# Altium PCB Ver2.PcbDoc
Units mm, origin at the board's own origin, x right, y up, seen from the top; angles counter-clockwise.
Board outline 108.84 x 44.45 mm, 2 copper layers (Top Layer, Bottom Layer); 32 components, 20 nets, 88 pads, 6 vias.
Unrouted connection lines stored in the file: 4.
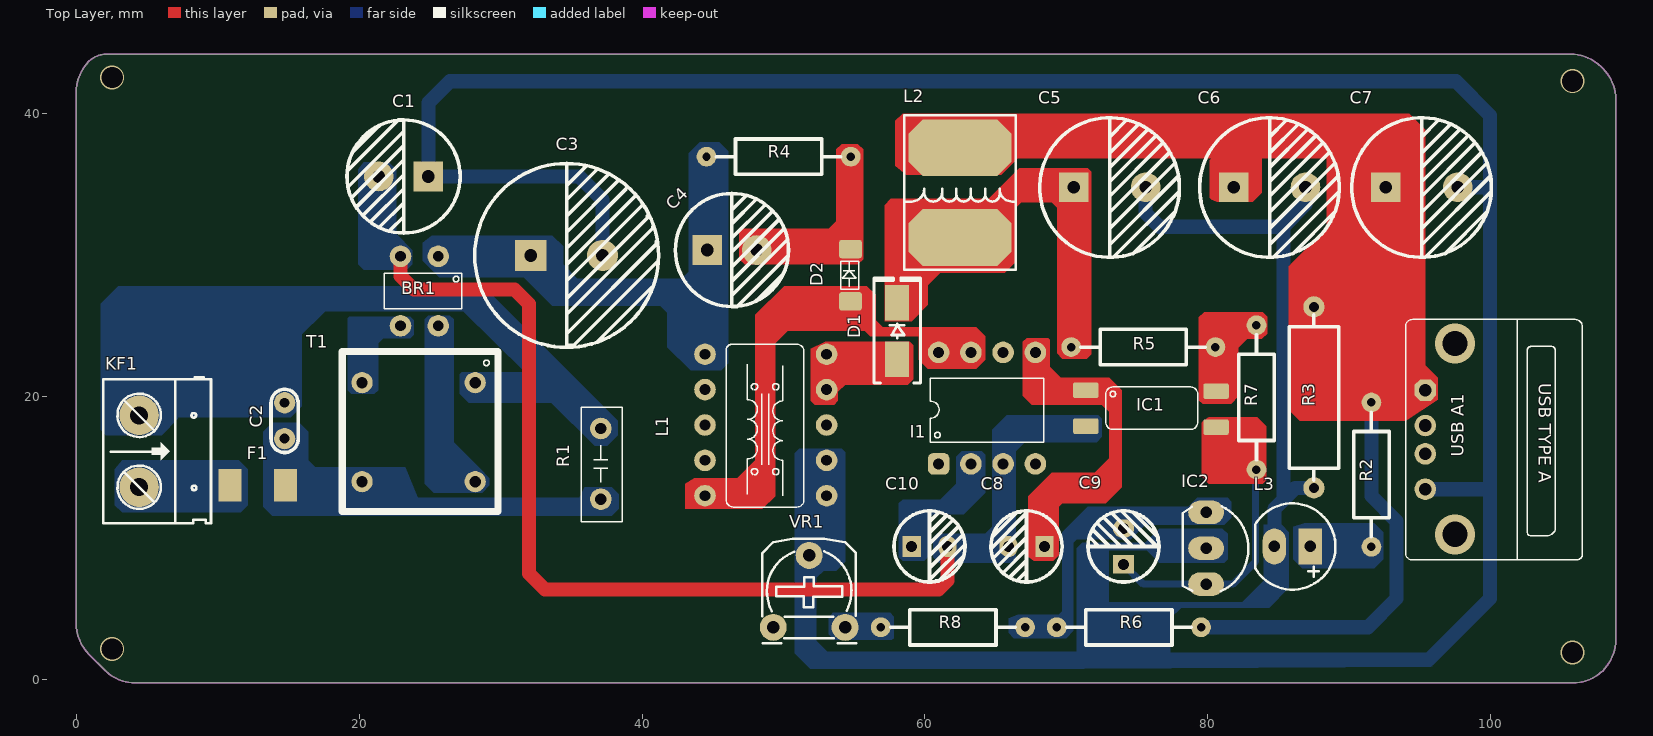
[diagram p0: Top Layer view]
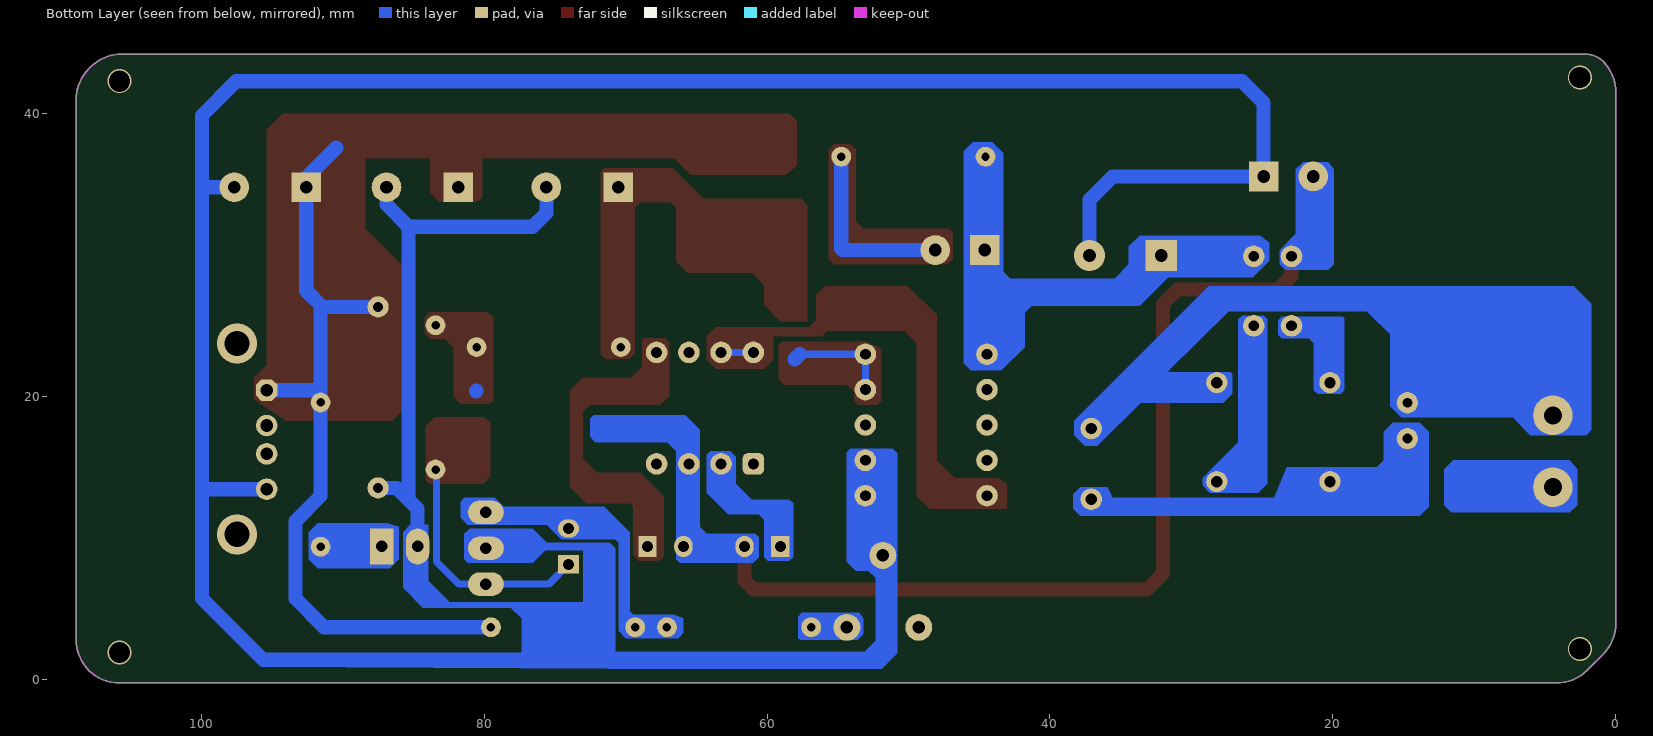
[diagram p1: Bottom Layer view, seen from below]
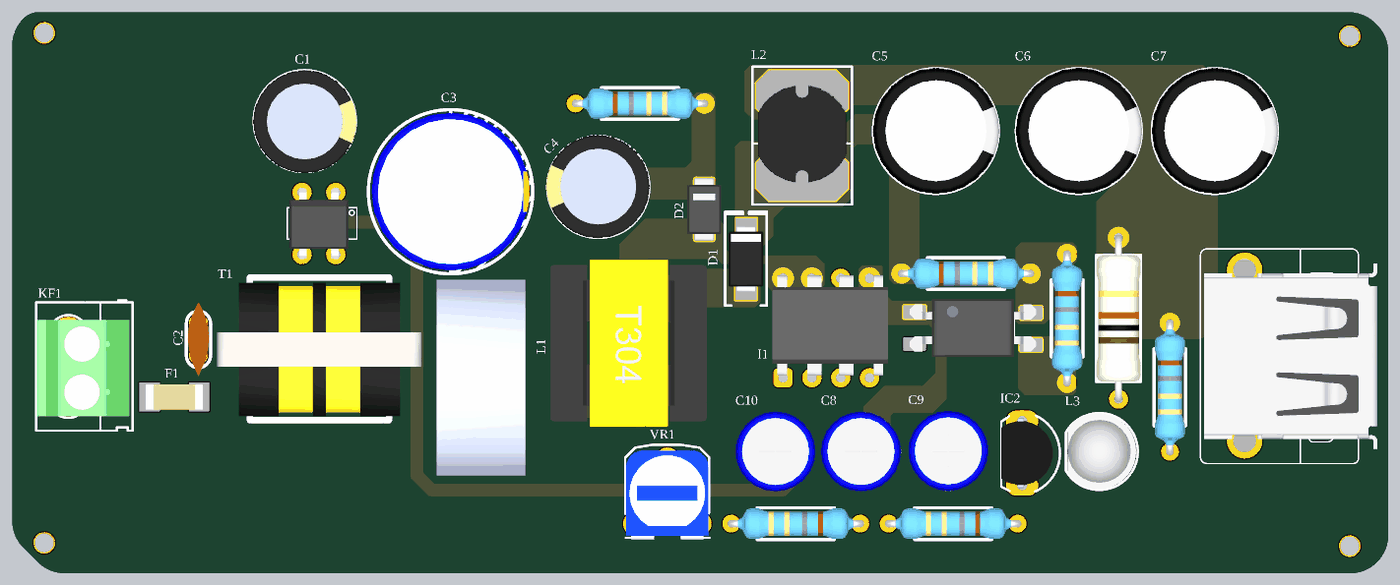
[diagram p2: 3D render of the assembled board from above, using the file's embedded part models]

## Layer stack, top to bottom
Top Solder: solder mask 0.0102, Solder Resist, Dk 3.5
Top Layer: signal copper 0.0356
Dielectric 1: dielectric 0.32, FR-4, Dk 4.8
Bottom Layer: signal copper 0.0356
Bottom Solder: solder mask 0.0102, Solder Resist, Dk 3.5

## Board outline
0.898,1.769 cw(c3.066,3.937) 0,3.937 0,41.529 cw(c3.066,41.529) 0.898,43.697 cw(c2.103,42.492) 2.103,44.196 105.664,44.196 cw(c105.664,41.13) 107.832,43.298 107.941,43.189 cw(c105.773,41.021) 108.839,41.021 108.839,2.794 cw(c105.773,2.794) 107.941,0.626 cw(c105.817,2.75) 105.817,-0.254 4.191,-0.254 cw(c4.191,2.812) 2.023,0.644

## Design rules (kind name [scope] priority, off if disabled: settings)
Clearance [All] p1: gap=0.254 ignorepadtopadclearanceinfootprint=FALSE except(0: Arc-Hole Track-Hole SMDPad-Hole THPad-Hole Via-Hole Fill-Hole Poly-Hole Region-Hole Text-Hole)
PolygonConnect [All] p1: connectstyle=Relief reliefconductorwidth=0.254 reliefentries=4 polygonreliefangle="90 Angle" airgapwidth=0.254
RoutingVias [All] p1: holewidth=0.711 width=1.27 viastyle="Through Hole" minholewidth=0.711 minwidth=1.27 maxholewidth=0.711 maxwidth=1.27
SolderMaskExpansion [All] p1: expansion=0.102
Width [All] p1: maxlimit=1 minlimit=0.5 preferedwidth=0.5
30 further rules are at their usual default settings.

## Components (designator, comment, footprint, x,y, rotation, side; value= is the part's Value field where it differs from the comment)
BR1 "MB6M" MB6M 24.257,27.305 r180 top
C1 "2.2nF" "tu hoa 8mm" 23.142,35.56 r180 top
C2 "104" "tu gom" 14.732,18.288 r90 top
C3 "22uF" "tu hoa 13mm" 34.671,29.972 r0 top
C4 "2.2nF" "tu hoa 8mm" 46.355,30.353 r0 top
C5 "1000uF" "tu hoa 10mm" 73.063,34.798 r0 top
C6 "1000uF" "tu hoa 10mm" 84.366,34.798 r0 top
C7 "1000uF" "tu hoa 10mm" 95.123,34.798 r0 top
C8 "0.1uF" "tu hoa 5mm" 67.183,9.398 r180 top
C9 "0.1uF" "tu hoa 5mm" 74.041,9.398 r90 top
C10 "100uF" "tu hoa 5mm" 60.325,9.398 r0 top
D1 "SS54 - SMC" "DIODE SMA" 58.039,24.638 r90 top
D2 "RS1M SMA" "RS1M SMA" 54.737,28.575 r270 top
F1 "0.5A 125V" "Cau Chi SMD1808" 12.827,13.716 r0 top
I1 "DK1203" DK1203 64.389,19.177 r0 top
IC1 "PC817" PC817 75.184,19.177 r0 top
IC2 "TL431" qto-92 79.883,9.271 r270 top
KF1 "CON 2 KF301" "Con 2 KF301 5.08" 4.445,18.669 r270 top
L1 "EE 13" "Trans EE13" 48.75,17.987 r270 top
L2 "10uH - 4A SMD" "Cuon Cam 7x7x5" 62.484,30.607 r0 top
L3 "LED 5mm" LED-5MM-RED 87.249,9.398 r180 top
R1 "7D471" "Inrush current limiter" 37.084,15.24 r270 top
R2 "1k" "tro vach 1/4w" 91.567,14.478 r90 top
R3 "470R" "tro vach 1/2w" 87.503,19.939 r90 top
R4 "68k" "tro vach 1/4w" 49.657,36.957 r180 top
R5 "1k" "tro vach 1/4w" 75.438,23.495 r180 top
R6 "4.7k" "tro vach 1/4w" 74.422,3.683 r0 top
R7 "4.7k" "tro vach 1/4w" 83.439,19.939 r90 top
R8 "4.7k" "tro vach 1/4w" 61.976,3.683 r0 top
T1 "UU9.8 103" "UU8.9 103" 24.003,17.78 r180 top
"USB A1" "USB" "USB A" 95.377,16.947 r270 top
VR1 "500R" "Bien Tro Tam Giac Dung" 49.276,3.683 r0 top

## Footprints (in the part's own frame and the unit in brackets; to place one, negate y for a bottom-side part, rotate by r counter-clockwise, add the part's x,y. Pads: shape width x height; smd on the part's side, far side on the other; paste and mask are expansions set on the pad)
"Bien Tro Tam Giac Dung" [mil] "RM065"
  round 75 hole 35: 1(0,0) 2(100,200) 3(200,0)
  silkscreen extent -31,-44 231,246, body extent -28,-50 228,228, height 279
"Cau Chi SMD1808" [mil]
  rect 64x90 smd: 1(-77,0) 2(77,0)
  body extent -91,-39 91,39, height 39
"Con 2 KF301 5.08" [mil]
  round 110 hole 50: 1(0,0) 2(200,0)
  silkscreen extent -106,-100 300,200, body extent -45,-97 255,190, height 335
"Cuon Cam 7x7x5" [mm] "Cuon Cam 7x7x5"
  oct 7.3x4 smd: 1(0,0.635) 2(0,6.985)
  silkscreen extent -3.94,-1.65 3.94,9.27, body extent -3.5,0.07 3.5,7.8, height 5.02
"DIODE SMA" [mm] "SMA"
  rect 2.5x1.7 smd: 1(-2,0) 2(2,0)
  silkscreen extent -3.68,-1.65 3.75,1.65, body extent -2.6,-1.37 2.6,1.37, height 2.4
DK1203 [mil]
  rrect50% 60x60 hole 30: 1(-134.65,-155.12)
  round 60 hole 30: 2(-44.88,-155.12) 3(44.88,-155.12) 4(134.65,-155.12) 5(134.65,155.12) 6(44.88,155.12) 7(-44.88,155.12) 8(-134.65,155.12)
  silkscreen extent -157,-94 157,83, body extent -167,-148 193,164, height 180
"Inrush current limiter" [mm]
  round 1.524 hole 0.8: 1(-2.5,0) 2(2.5,0)
  silkscreen extent -4,-1.4 4.1,1.5, body extent -7.75,-3.5 7.75,3.5, height 19
LED-5MM-RED [mil] "LED 2 PIN, 5 ly , Only colour,pin to pin 100mil"
  rect 65x100 hole 32: 1(0,0)
  oval 65x100 hole 32: 2(100,0)
  silkscreen extent -70,-120 154,120, body extent -65,-119 149,118, height 339
MB6M [mil]
  round 60 hole 30: 1(-52.56,-102.56) 2(52.56,-102.56) 3(52.56,90.75) 4(-52.56,90.75)
  silkscreen extent -118,-55 98,43, body extent -92,-133 92,125, height 83
PC817 [mm]
  rrect25% 1.8x1.1 smd: 1(-3.81,1.27) 2(-3.81,-1.27) 3(5.4,-1.34) 4(5.4,1.2)
  silkscreen extent -2.4,-1.5 4.1,1.5, body extent -4.2,-2.29 5.8,2.29, height 3.75
qto-92 [mil] "TO-92"
  oval 66x100 hole 32: 1(-100,0) 2(0,0) 3(100,0)
  silkscreen extent -117,-65 120,118, body extent -109,-66 109,95, height 245
"RS1M SMA" [mm]
  rrect25% 1.3x1.6 smd: 1(-1.85,0) 2(1.85,0)
  silkscreen extent -1,-0.7 1,0.6, body extent -2.5,-1.35 2.5,1.35, height 2.38
"Trans EE13" [mil]
  round 60 hole 30: 1(-196.85,-169.29) 2(-98.43,-169.29) 3(0,-169.29) 4(98.43,-169.29) 5(196.85,-169.29) 6(196.85,169.29) 7(98.43,169.29) 8(0,169.29) 9(-98.43,169.29) 10(-196.85,169.29)
  silkscreen extent -224,-110 228,106, body extent -260,-244 260,244, height 468
"tro vach 1/2w" [mm]
  round 1.5 hole 0.7: 1(-6.4,0) 2(6.4,0)
  silkscreen extent -5.84,-1.75 5.84,1.75, body extent -6.62,-1.75 6.62,1.75, height 3.5
"tro vach 1/4w" [mm]
  round 1.4 hole 0.6: 1(-5.1,0) 2(5.1,0)
  silkscreen extent -4.39,-1.25 4.42,1.25, body extent -5.38,-1.2 5.38,1.2, height 2.41
"tu gom" [mm] "Tu gom mini"
  round 1.5 hole 0.7: 1(-1.27,0) 2(1.27,0)
  silkscreen extent -2.25,-0.97 2.22,0.97, body extent -2.92,-0.85 2.92,0.85, height 6.12
"tu hoa 5mm" [mm]
  rect 1.3x1.5 hole 0.8: 1(-1.27,0)
  oval 1.3x1.5 hole 0.8: 2(1.27,0)
  silkscreen extent -2.51,-2.51 2.51,2.51, body extent -3.12,-3.18 3.23,3.18, height 14.55
"tu hoa 8mm" [mm]
  rect 2.1x2.1 hole 0.9: 1(-1.75,0)
  round 2.1 hole 0.9: 2(1.75,0)
  silkscreen extent -4,-4 4,4, body extent -4.1,-4.07 4.1,4.13, height 13.81
"tu hoa 10mm" [mm]
  rect 2.1x2.1 hole 0.9: 1(-2.54,0)
  round 2.1 hole 0.9: 2(2.54,0)
  silkscreen extent -4.95,-4.96 4.93,4.92, body extent -5,-5 4.97,5, height 20.01
"tu hoa 13mm" [mm]
  rect 2.2x2.2 hole 0.9: 1(-2.54,0)
  round 2.2 hole 0.9: 2(2.54,0)
  silkscreen extent -6.5,-6.5 6.5,6.5, body extent -6.25,-6.25 6.26,6.25, height 23.02
"USB A" [mm]
  oct 1.524x1.524 hole 0.9: 1(-3.5,0)
  round 1.524 hole 0.9: 2(-1,0) 3(1,0) 4(3.5,0)
  silkscreen extent -8.5,-1.4 8.5,11.1, body extent -7.9,-1.1 7.9,12.6, height 6.95
"UU8.9 103" [mm]
  round 1.5 hole 0.8: 1(-4.2,-3.2) 2(3.8,-3.2) 3(3.8,3.8) 4(-4.2,3.8)
  silkscreen extent -5.8,-5.4 5.2,5.9, body extent -8.38,-5 7.78,5.6, height 15.3

## Part data
C1 C4: library part "Tu Hoa 2.2uF 400V 8x12", "C?m", Chung_Loai=C?m, Don_Vi=Con, Ma_Hang=MH003743, So_Chan=2, Ten_Linh_Kien="T? Hóa 2.2uF 400V 8x12MM"
C2: library part "Tu gom 104 50V", "C?m", Chung_Loai=C?m, Don_Vi=Con, Ma_Hang=MH004761, So_Chan=2, Ten_Linh_Kien="T? g?m 104 100nF 50V"
C3: library part "Tu Hoa 22uF 400V 13x20", "C?m", Chung_Loai=C?m, Don_Vi=Con, Ma_Hang=MH004801, So_Chan=2, Ten_Linh_Kien="T? Hóa 22uF 400V 13x20MM"
C5 C6 C7: library part "Tu Hoa 1000uF 10V 10x12", "C?m", Chung_Loai=C?m, Don_Vi=Con, Ma_Hang=MH006614, So_Chan=2, Ten_Linh_Kien="T? Hóa 1000uF 10V 10x12MM"
C8 C9: library part "Tu Hoa 0.1uF 50V 5x11", "C?m", Chung_Loai=C?m, Don_Vi=Con, Ma_Hang=MH006853, So_Chan=2, Ten_Linh_Kien="T? Hóa 0.1uF 50V"
C10: library part "Tu Hoa 100uF 16V 5x7", "C?m", Chung_Loai=C?m, Don_Vi=Con, Ma_Hang=MH001347, So_Chan=2, Ten_Linh_Kien="T? Hóa 100uF 16V 5x7MM"
D1: library part "Diode SS34 ( 1N5822 )", "Dán", Chung_Loai=Dán, Don_Vi=Con, Ma_Hang=MH002104, Ten_Linh_Kien="Diode SS34 3A 40V SMA ( 1N5822 SS34A)"
F1: library part "Cau chi 0.5A 125V SMD1808", "Cau chi 0.5A 125V SMD1808", Ma_Hang=MH009241, Ten="C?u Chì 0.5A 125V SMD1808 0451.500MRL"
I1: library part Dk1203
IC1: library part PC871
IC2: "Programmable Shunt Regulator"
KF1: "C?m", Chung_Loai=C?m, Don_Vi=Con, Ma_Hang=MH000987, Ten_Linh_Kien="CON 2 KF301-2P 5.08MM Xanh Duong"
L1: library part "EE 20-10-6"
L2: library part "CUON CAM 47uH SMD", "Dán", Chung_Loai=Dán, Don_Vi=Con, Ma_Hang=MH004211, Ten_Linh_Kien="Cu?n C?m 47uH 7x7x4MM CD74R"
L3: library part "LED 5mm Do", "C?m", Chung_Loai=C?m, Don_Vi=Con, Ma_Hang=MH008967, Ten_Linh_Kien="Led 5MM Ph? Ð? (1000c)"
R1: library part "Tu chong set"
R2 R5: library part "Tro Vach 1/4W 5% 1k", "C?m", Chung_Loai=C?m, Don_Vi=Con, Ma_Hang=MH007390, So_Chan=2, Ten_Linh_Kien="Tr? V?ch 1/4w 5% 1k"
R3: library part "Tro Vach 1/2W 5% 470R", "C?m", Chung_Loai=C?m, Don_Vi=Con, Ma_Hang=MH006200, So_Chan=2, Ten_Linh_Kien="Tr? 5% 1/2w 470R"
R4: library part "Tro Vach 1/4W 5% 68k", "C?m", Chung_Loai=C?m, Don_Vi=Con, Ma_Hang=MH007332, So_Chan=2, Ten_Linh_Kien="Tr? V?ch 1/4w 5% 68k"
R6 R7 R8: library part "Tro Vach 1/4W 5% 4.7k", "C?m", Chung_Loai=C?m, Don_Vi=Con, Ma_Hang=MH007317, So_Chan=2, Ten_Linh_Kien="Tr? V?ch 1/4w 5% 4.7k"
"USB A1": library part "USB TYPE A FEMALE"
VR1: library part "Bien tro tam giac 1K Dung", "C?m", Chung_Loai=C?m, Don_Vi=Con, Ma_Hang=MH003709, Ten_Linh_Kien="Bi?n Tr? Tam Giác 102-1K RM065"

## Via types
v1: diameter 1.7, hole 1.5, Top Layer to Bottom Layer, 4 vias
v2: diameter 2.8, hole 1.8, Top Layer to Bottom Layer, 2 vias

## Nets (pads, with @x,y where several pads share a name; then routed paths per layer and width w, separated by ;. In a path a pad name is that pad's centre, name@x,y a point inside that pad or via, vN(x,y) a via of type N, cw(c..) or ccw(c..) an arc to the next point about the centre after c; other vN are vias at no path point)
5V-1: C5.1 D1.2 L2.1 R5.2 | length 6.3
  Top Layer w1: D1.2@58.039,26.797 L2.1
5V-2: "USB A1.1" C6.1 C7.1 L2.2 R2.2 R3.2 R6.2 | length 77.9
  Top Layer w1: L2.2 80.518,37.592 81.826,36.284 C6.1
  Bottom Layer w1: R6.2 91.313,3.683 93.345,5.715 93.345,11.176 91.567,12.954 R2.2 91.567,20.32 ; R3.2 91.44,26.339 ; 90.462,37.592 92.583,35.471 C7.1 92.583,27.482 91.44,26.339 ; 95.377,20.447 91.694,20.447 91.567,20.32 ; 91.44,26.339 91.567,26.212 91.567,20.32
DCLine: BR1.1 C3.1 C4.1 L1.1 R4.2 | length 34.1
  Bottom Layer w1: BR1.1 32.069,29.91 C3.1 34.925,27.178 44.45,27.178 ; L1.1 44.45,27.178 ; R4.2 44.557,30.401 C4.1 44.45,30.198 44.45,27.178
GND-1: BR1.2 C1.2 C8.2 C10.2 I1.3 IC1.2 | length 87.7
  Top Layer w1: BR1.2 22.922,28.513 23.876,27.559 30.988,27.559 32.004,26.543 32.004,7.493 33.147,6.35 60.96,6.35 61.595,6.985 C10.2
  Bottom Layer w0.5: C10.2 C8.2 65.529,9.782 I1.3 65.529,17.015 66.421,17.907 71.374,17.907
  Bottom Layer w1: C1.2 21.392,31.44 BR1.2
GND-2: "USB A1.4" C1.1 C3.2 C5.2 C6.2 C7.2 IC2.2 L1.6 L1.7 L3.2 R3.1 VR1.2 | length 244.6
  Bottom Layer w0.5: VR1.2 51.816,2.286 52.832,1.27 72.009,1.27 ; IC2.2 IC2.2@79.883,9.282
  Bottom Layer w1: C3.2 37.211,33.909 35.56,35.56 C1.1 24.892,40.767 26.416,42.291 97.536,42.291 99.949,39.878 99.949,34.798 ; VR1.2 53.05,9.997 L1.6 L1.7 ; 72.009,2.794 73.406,1.397 95.631,1.397 99.949,5.715 99.949,13.447 ; C5.2 75.603,32.982 76.581,32.004 85.344,32.004 ; L3.2 84.709,12.065 85.471,12.827 ; C6.2 86.906,33.566 85.344,32.004 ; R3.1 86.183,13.539 85.471,12.827 ; 95.377,13.385 95.377,13.447 99.949,13.447 ; C7.2@98.336,34.798 99.949,34.798 ; 85.344,32.004 85.344,12.954 85.471,12.827 ; 99.949,13.447 99.949,34.798
NetBR1_3: BR1.3 T1.2 | length 6.2
  Bottom Layer w0.5: T1.2 20.203,24.14 21.063,25 BR1.3
NetBR1_4: BR1.4 T1.4 | length 12.1
  Bottom Layer w0.5: BR1.4 25.592,16.591 T1.4
NetC2_1: C2.1 F1.2 R1.2 T1.3 | length 8.9
  Bottom Layer w0.5: C2.1 14.783,16.967 14.783,13.716 15.047,13.98 T1.3 ; R1.2@37.084,12.726 R1.2
NetC2_2: C2.2 KF1.1 R1.1 T1.1 | length 47.9
  Bottom Layer w0.5: KF1.1 5.334,19.558 C2.2 14.732,23.495 18.288,27.051 27.773,27.051 33.844,20.98 ; T1.1 33.844,20.98 ; R1.1 33.844,20.98
NetC4_2: C4.2 D2.1 R4.1 | length 13.2
  Bottom Layer w1: C4.2 54.665,30.353 54.737,30.425 54.757,30.445 R4.1
NetC8_1: C8.1 I1.5 IC1.1 | length 22.1
  Top Layer w0.5: I1.5 67.809,21.218 68.58,20.447 IC1.1 72.644,20.447 73.279,19.812 73.279,13.589 72.517,12.827 69.469,12.827 68.453,11.811 C8.1
NetC9_1: C9.1 IC1.3 IC2.3 R7.1 | length 22.3
  Top Layer w0.5: IC1.3 82.239,17.837 83.439,16.637 R7.1
  Bottom Layer w0.5: C9.1 75.438,6.731 IC2.3 81.788,6.731 83.38,8.323 83.38,14.839 R7.1
NetC9_2: C9.2 IC2.1 R6.1 R8.2 | length 20.1
  Bottom Layer w0.5: R8.2 R6.1 69.977,4.338 69.977,10.033 70.612,10.668 ; 71.12,11.049 70.612,10.668 ; IC2.1 71.755,11.811 70.612,10.668
NetC10_1: C10.1 I1.2 | length 9
  Bottom Layer w0.5: C10.1 59.055,11.557 59.944,12.446 62.357,12.446 63.249,13.338 I1.2
NetD1_1: D1.1 L1.9 L1.10 | length 7.6
  Bottom Layer w0.5: L1.9 L1.10 57.69,22.987
  Bottom Layer w1: 57.69,22.987 58.039,22.638
NetD2_2: D2.2 I1.7 I1.8 L1.5 | length 24.1
  Top Layer w0.5: L1.5 46.515,12.987 48.387,14.859 48.387,24.765 50.347,26.725 D2.2
  Bottom Layer w0.5: I1.8 I1.7
NetF1_1: F1.1 KF1.2 | length 6.5
  Bottom Layer w0.5: KF1.2 10.744,13.589
  Bottom Layer w1: 10.744,13.589 10.871,13.716
NetIC1_4: IC1.4 R5.1 R7.2 | length 0.1
  Bottom Layer w1: 80.538,20.423 80.584,20.377
NetL3_1: L3.1 R2.1 | length 4.3
  Bottom Layer w1: L3.1 91.547,9.398 R2.1
NetR8_1: R8.1 VR1.3 | length 2.5
  Bottom Layer w0.5: VR1.3 R8.1
pads on no net: "USB A1.2" "USB A1.3" I1.1 I1.4 I1.6 L1.2 L1.3 L1.4 L1.8 VR1.1
copper on no net:
  other v1: 105.791,1.905 2.54,2.159 105.791,42.291 2.54,42.545
  other v2: 97.477,10.247 97.477,23.747

## Keep-outs
Keep-Out Layer:
  the board outline again, w0.1

## Other copper
Top Layer:
  region net 5V-2: 88.392,18.288 86.487,18.288 85.725,19.05 85.725,29.21 88.392,31.877
  region net 5V-2: 80.645,33.782 83.185,33.782 83.82,34.417 83.82,36.83 80.264,36.83 80.137,36.703 80.137,34.036 80.264,33.909
  region net 5V-2: 58.674,35.687 65.405,35.687 66.548,36.83 88.392,36.83 88.392,18.288 87.249,18.288 92.456,18.288 93.98,18.288 96.266,19.774 96.266,21.336 95.377,22.225 95.377,38.862 94.234,40.005 58.42,40.005 57.912,39.497 57.912,36.322
  region net NetC9_1: 80.073,18.542 83.502,18.542 84.138,17.907 84.138,14.097 83.883,13.843 80.073,13.843 79.566,14.351 79.566,18.161 79.692,18.288
  region net NetIC1_4: 79.629,19.494 81.661,19.494 82.169,20.002 82.169,23.431 82.804,24.066 83.82,24.066 84.201,24.447 84.201,25.654 83.883,25.971 79.756,25.971 79.375,25.59 79.375,19.748
  region net NetD2_2: 43.688,14.224 46.736,14.224 48.006,15.494 48.006,25.781 50.038,27.813 55.88,27.813 56.515,27.178 56.515,25.4 57.023,24.892 63.627,24.892 64.262,24.257 64.262,22.606 63.627,21.971 60.198,21.971 59.563,22.606 59.563,24.257 56.134,24.257 55.753,24.638 50.292,24.638 49.403,23.749 49.403,12.954 48.514,12.065 43.053,12.065 43.053,13.843
  region net NetC4_2: 55.245,29.337 55.626,29.718 55.626,37.465 55.245,37.846 54.102,37.846 53.721,37.465 53.721,32.385 53.213,31.877 47.117,31.877 46.863,31.623 46.863,29.718 47.244,29.337
  region net NetD1_1: 52.959,23.876 58.928,23.876 59.182,23.622 59.182,21.209 58.801,20.828 54.356,20.828 53.848,20.32 53.848,19.685 53.594,19.431 52.197,19.431 51.943,19.685 51.943,23.368
  region net 5V-1: 57.15,25.336 59.055,25.336 60.198,26.479 60.198,27.877 61.087,28.765 65.659,28.765 66.421,29.527 66.421,33.337 66.802,33.718 68.961,33.718 69.342,33.337 69.342,23.05 69.723,22.669 71.437,22.669 71.755,22.987 71.755,35.877 71.501,36.131 66.675,36.131 64.516,33.972 57.594,33.972 57.15,33.528
  region net NetC8_1: 67.183,24.13 68.707,24.13 68.834,24.003 68.834,22.098 69.596,21.336 73.025,21.336 73.914,20.447 73.914,13.589 72.771,12.446 69.723,12.446 69.469,12.192 69.469,10.287 69.469,8.763 69.088,8.382 67.691,8.382 67.31,8.668 67.31,12.954 68.961,14.605 72.009,14.605 73.025,15.621 73.025,18.923 72.517,19.431 67.564,19.431 66.929,20.066 66.929,23.876
Bottom Layer:
  region net DCLine: 25.146,31.369 33.655,31.369 34.417,30.607 34.417,29.337 35.433,28.321 42.799,28.321 43.307,28.829 43.307,37.211 44.069,37.973 45.466,37.973 46.101,37.338 46.101,22.352 45.593,21.844 43.434,21.844 41.783,23.495 41.783,25.908 41.275,26.416 33.655,26.416 31.623,28.448 25.654,28.448 24.511,29.591 24.511,30.861
  region net GND-2: 54.102,16.319 54.356,16.066 54.356,8.319 53.721,7.683 52.832,7.683 52.324,7.175 52.324,2.73 53.086,1.968 70.739,1.968 71.249,1.459 71.249,0.762 51.88,0.762 50.8,1.841 50.8,16.002 51.117,16.319
  region net NetC2_2: 6.032,17.272 7.175,18.415 7.175,18.542 15.176,18.542 15.938,19.304 15.938,24.955 17.018,26.035 27.368,26.035 31.75,21.717 27.241,21.717 27.114,21.59 27.114,20.193 27.749,19.558 33.591,19.558 36.639,16.51 37.529,16.51 38.291,17.272 38.291,18.288 28.765,27.813 2.984,27.813 1.714,26.543 1.714,17.653 2.095,17.272
  region net NetC9_2: 66.548,4.572 69.469,4.572 69.723,4.826 69.723,10.414 71.501,12.192 78.613,12.192 79.248,12.827 81.407,12.827 81.661,12.573 81.661,11.43 81.153,10.922 75.565,10.922 75.057,11.43 72.263,11.43 70.485,9.652 70.485,3.429 69.977,2.921 66.294,2.921 65.913,3.302 65.913,4.318
  region net GND-2: 81.407,9.144 81.407,10.287 81.026,10.668 76.581,10.668 75.565,9.652 71.12,9.652 70.739,9.271 70.739,1.27 71.249,0.76 95.885,0.889 77.343,1.778 77.343,4.318 78.105,5.08 84.328,5.08 85.725,6.477 85.725,10.414 85.217,10.922 83.947,10.922 83.947,6.985 82.423,5.461 72.995,5.461 72.995,9.144
  region net NetF1_1: 3.238,15.494 11.493,15.494 12.128,14.859 12.128,12.319 11.62,11.811 3.238,11.811 2.73,12.319 2.73,14.859
  region net NetBR1_3: 21.082,20.193 21.336,20.447 21.336,23.749 21.717,24.13 23.622,24.13 23.876,24.384 23.876,25.4 23.622,25.654 19.304,25.654 19.177,25.527 19.177,20.447 19.431,20.193
  region net NetC10_1: 58.42,8.382 59.944,8.382 60.198,8.636 60.198,11.303 60.579,11.684 62.738,11.684 64.262,13.208 64.262,15.875 64.008,16.129 62.611,16.129 62.23,15.748 62.23,13.843 61.087,12.7 58.42,12.7 58.166,12.446 58.166,8.636
  region net NetR8_1: 53.467,4.699 57.531,4.699 57.785,4.445 57.785,2.921 57.658,2.794 53.594,2.794 53.213,3.175 53.213,4.318
  region net GND-1: 61.214,10.287 64.262,10.287 64.77,10.795 64.77,17.653 65.786,18.669 72.263,18.669 72.517,18.415 72.517,17.145 72.136,16.764 67.056,16.764 66.421,16.129 66.421,8.509 66.167,8.255 60.96,8.255 60.579,8.636 60.579,10.033 60.833,10.287
  region net NetC2_1: 20.955,14.986 23.241,14.986 24.13,12.827 35.56,12.827 35.941,13.589 37.846,13.589 38.354,13.081 38.354,12.065 37.846,11.557 13.843,11.557 13.208,12.192 13.208,12.954
  region net NetL3_1: 86.804,11.049 91.757,11.049 92.392,10.414 92.392,8.509 91.757,7.874 86.677,7.874 86.042,8.509 86.042,10.795
  region net NetC9_2: 75.565,10.922 74.549,9.906 70.739,9.906 72.263,11.43 75.057,11.43
  region net GND-1: 20.32,36.576 22.098,36.576 22.606,36.068 22.606,31.496 23.749,30.353 23.749,29.337 23.368,28.956 20.32,28.956 19.939,29.337 19.939,36.068
  region net NetC2_1: 13.843,18.161 15.748,18.161 16.383,17.526 16.383,15.494 16.891,14.986 20.955,14.986 21.336,14.605 21.336,12.954 20.828,12.446 13.716,12.446 13.208,12.954 13.208,17.526
  region net GND-2: 81.407,9.144 81.407,8.509 81.153,8.255 76.581,8.255 75.692,9.144
  region net NetBR1_4: 24.892,25.717 26.416,25.717 26.67,25.463 26.67,16.764 28.511,14.922 29.21,14.224 29.21,13.716 28.702,13.208 25.273,13.208 24.638,13.843 24.638,25.463
  region net GND-2: 73.025,9.144 73.004,9.123 73.004,7.302 72.147,9.144
  region net GND-2: 81.407,9.144 81.407,8.636
  region: 61.341,10.287

## Text inside footprints (layer, text, board x,y; h text height)
"USB A1": Top Overlay "USB TYPE A" at 103.077,20.947 h1.52 r270